# Altium PCB BLE.PcbDoc
Units mil, origin at the board's own origin, x right, y up, seen from the top; angles counter-clockwise.
Board outline 1660.03 x 1390.03 mil, 2 copper layers (Top Layer, Bottom Layer); 18 components, 16 nets, 103 pads, 3 vias.
Unrouted connection lines stored in the file: 4.
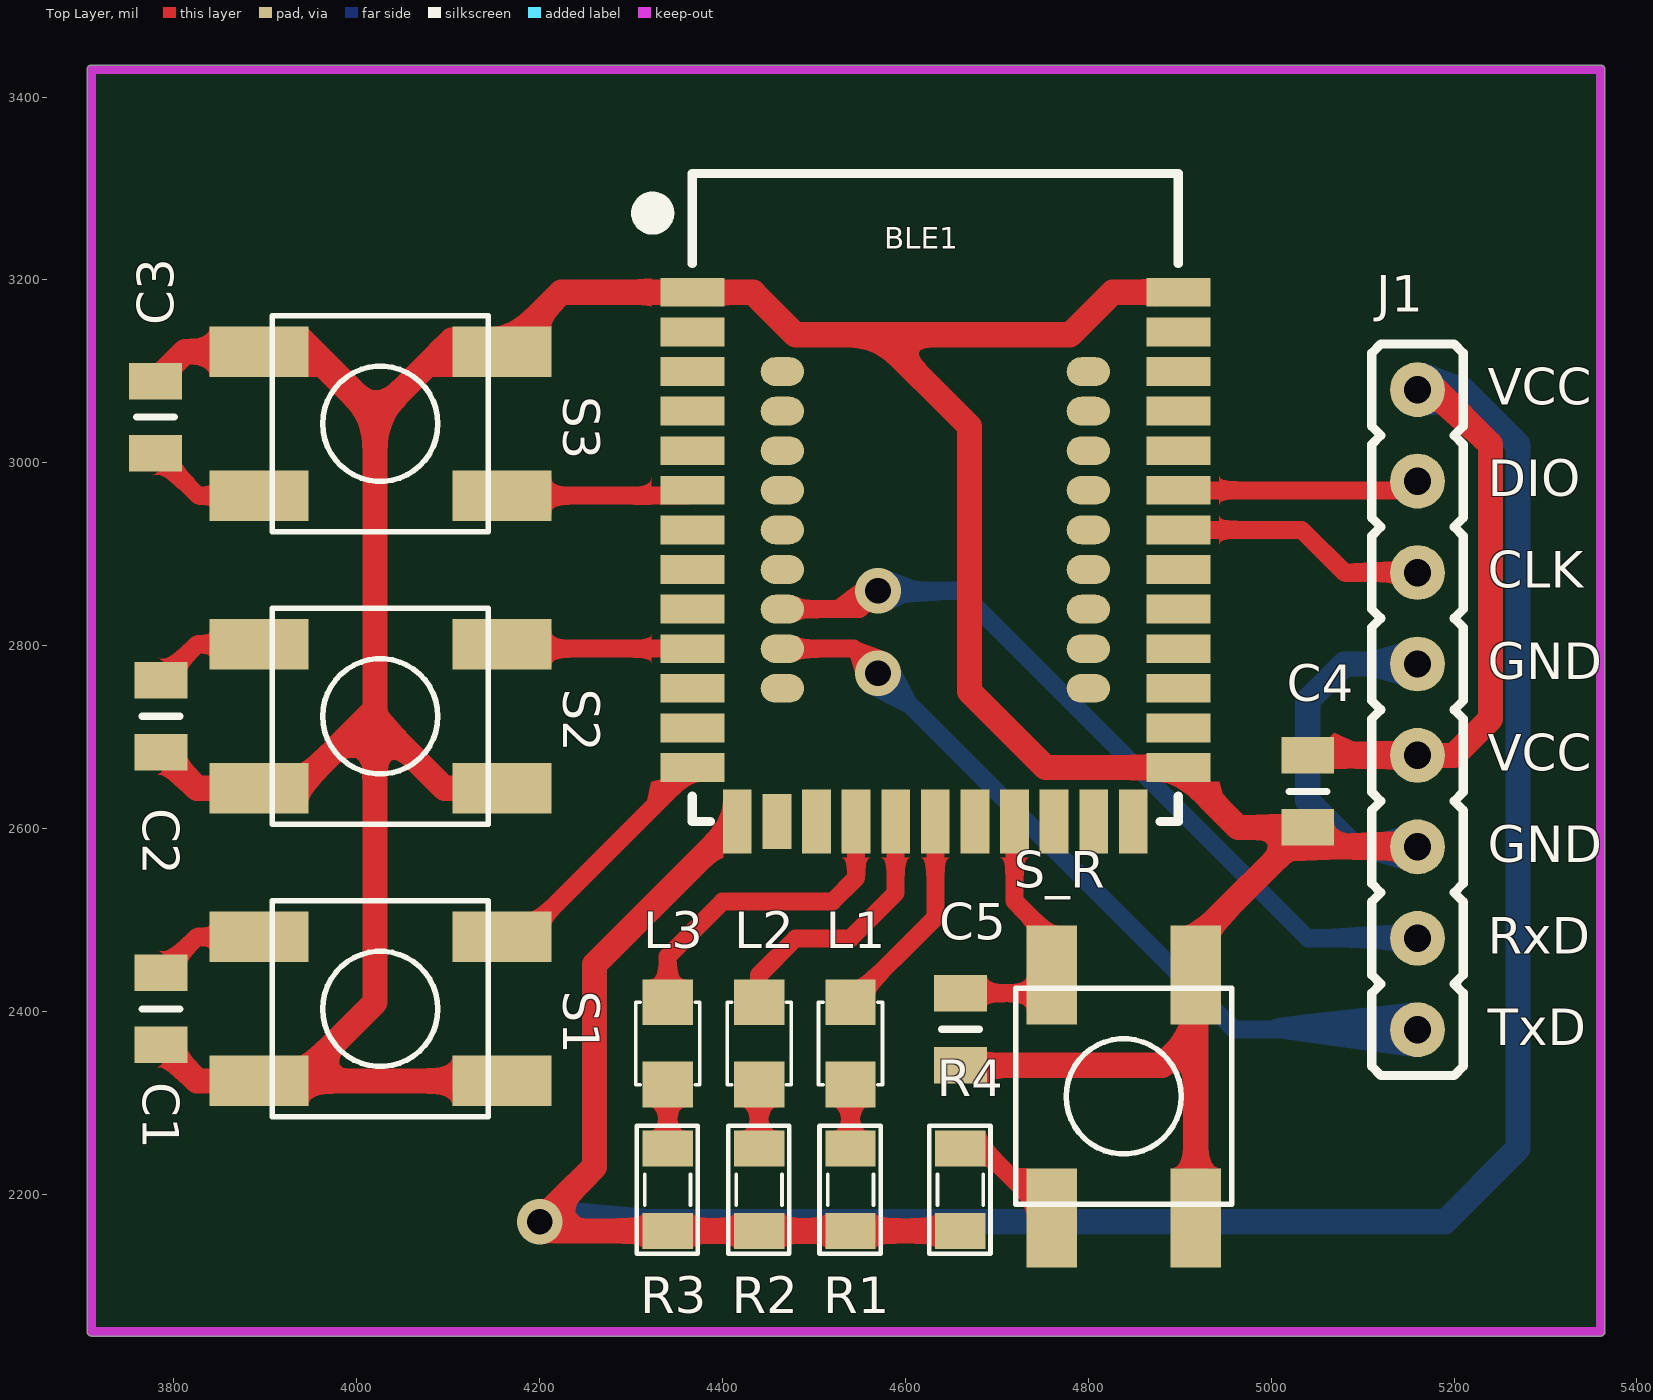
[diagram p0: Top Layer view]
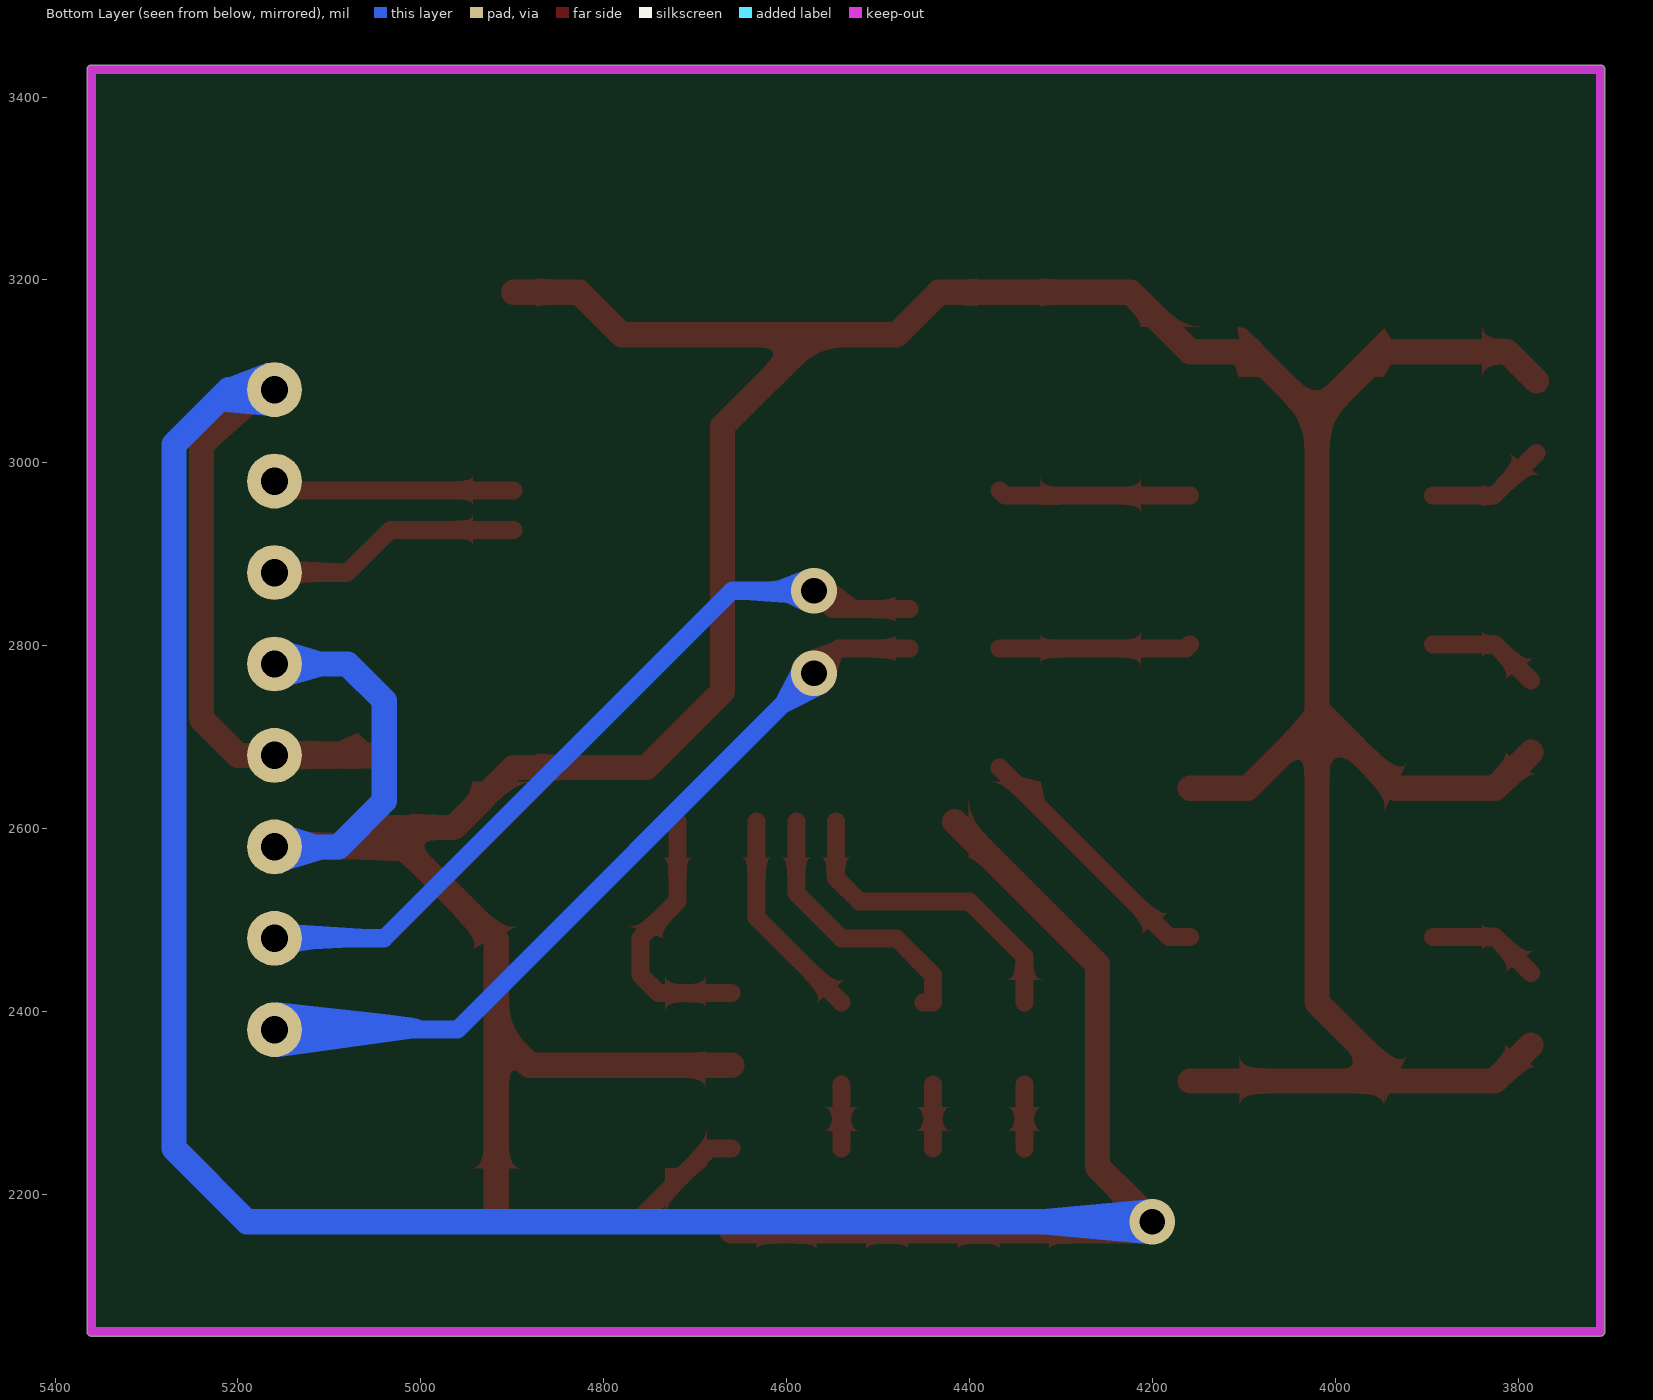
[diagram p1: Bottom Layer view, seen from below]

## Layer stack, top to bottom
Top Solder: solder mask 0.4, Solder Resist, Dk 3.5
Top Layer: signal copper 1.4
Dielectric 1: dielectric 12.6, FR-4, Dk 4.8
Bottom Layer: signal copper 1.4
Bottom Solder: solder mask 0.4, Solder Resist, Dk 3.5

## Board outline
3704.99,2050 3704.98,3430 cw(c3710,3430) 3710,3435.01 5360,3435.01 cw(c5360,3430) 5365.02,3430 5365.02,2050 cw(c5360,2050) 5360,2044.98 3710,2044.98 cw(c3710,2050)

## Design rules (kind name [scope] priority, off if disabled: settings)
Clearance [All] p1: gap=0 ignorepadtopadclearanceinfootprint=FALSE
PlaneConnect [All] p1: planeconnectstyle=Direct reliefexpansion=20 reliefentries=4 reliefconductorwidth=10 reliefairgap=10
PolygonConnect [All] p1: connectstyle=Direct reliefconductorwidth=10 reliefentries=4 polygonreliefangle="90 Angle" airgapwidth=10
RoomDefinition BLE [InComponentClass('BLE')] p1: confinementstyle=ConfineIn formatcopy=TRUE lockcomponents=FALSE outline 0,0 2000,0 2000,1000 0,1000
RoutingVias [All] p1: holewidth=28 width=50 viastyle="Through Hole" minholewidth=28 minwidth=50 maxholewidth=28 maxwidth=50
SolderMaskExpansion [All] p1: expansion=4
Width [All] p1: maxlimit=39.37 minlimit=19.68 preferedwidth=27.56 minimp=50.000000 maximp=50.000000 favimp=50.000000
29 further rules are at their usual default settings.

## Components (designator, comment, footprint, x,y, rotation, side; value= is the part's Value field where it differs from the comment)
BLE1 "Holyiot 18010" "Holyiot 18010" 4632.72,2897.09 r0 top
C1 "Cap" CAP-0805 3785.72,2402.77 r270 top
C2 "Cap" CAP-0805 3785.72,2722.77 r270 top
C3 "Cap" CAP-0805 3780,3050 r90 top
C4 "Cap" CAP-0805 5040,2640.63 r90 top
C5 "Cap" CAP-0805 4660,2380.63 r90 top
J1 "JP_8" JP_8 5160,3080 r270 top
L1 "LED" LED0805 4540,2365 r0 top
L2 "LED" LED0805 4440,2365 r0 top
L3 "LED" LED0805 4340,2365 r0 top
R1 "Res" RES-SMD-0805 4540,2205 r270 top
R2 "Res" RES-SMD-0805 4440,2205 r270 top
R3 "Res" RES-SMD-0805 4340,2205 r270 top
R4 "10k" RES0805 4660,2205 r270 top
S1 "Button" button_smd 4025.72,2402.77 r0 top
S2 "Button" button_smd 4025.72,2722.77 r0 top
S3 "Button" button_smd 4025.72,3042.77 r0 top
S_R "Button" button_smd 4838.74,2307.13 r90 top

## Footprints (in the part's own frame and the unit in brackets; to place one, negate y for a bottom-side part, rotate by r counter-clockwise, add the part's x,y. Pads: shape width x height; smd on the part's side, far side on the other; paste and mask are expansions set on the pad)
button_smd [mm]
  rect 2.75x1.4 smd: 1(-3.375,2) 1(3.375,2) 2(-3.375,-2) 2(3.375,-2)
  silkscreen extent -3,-3 3,3, body extent -4,-3 4,3.3, height 3.1
CAP-0805 [mil]
  rect 40x57.87 smd: 1(-39.37,0) 2(39.37,0)
  silkscreen extent 0,-21 0,21, body extent -39,-25 39,25, height 57
"Holyiot 18010" [mm]
  rect 1.778x0.8 smd: 1(-6.751,7.35) 2(-6.751,6.25) 3(-6.751,5.15) 4(-6.751,4.05) 5(-6.751,2.95) 6(-6.751,1.85) 7(-6.751,0.75) 8(-6.751,-0.35) 9(-6.751,-1.45) 10(-6.751,-2.55) 11(-6.751,-3.65) 12(-6.751,-4.75) 13(-6.751,-5.85) 32(6.749,7.35) 33(6.749,6.25) 34(6.749,5.15) 35(6.749,4.05) 36(6.749,2.95) 37(6.749,1.85) 38(6.749,0.75) 39(6.749,-0.35) 40(6.749,-1.45) 41(6.749,-2.55) 42(6.749,-3.65) 43(6.749,-4.75) 44(6.751,-5.852)
  oval 1.2x0.8 smd: 14(-4.251,5.15) 15(-4.251,4.05) 16(-4.251,2.95) 17(-4.251,1.85) 18(-4.251,0.75) 19(-4.251,-0.35) 20(-4.251,-1.45) 21(-4.251,-2.55) 22(-4.251,-3.65) 23(4.249,5.15) 24(4.249,4.05) 25(4.249,2.95) 26(4.249,1.85) 27(4.249,0.75) 28(4.249,-0.35) 29(4.249,-1.45) 30(4.249,-2.55) 31(4.249,-3.65)
  rect 0.8x1.778 smd: 45(5.499,-7.35) 46(4.399,-7.35) 47(3.299,-7.35) 48(2.199,-7.35) 49(1.099,-7.35) 50(-0.001,-7.35) 51(-1.101,-7.35) 52(-2.201,-7.35) 53(-3.301,-7.35) 55(-5.501,-7.35)
  rect 0.8x1.524 smd: 54(-4.401,-7.35)
  silkscreen extent -8.15,-7.35 6.75,10.65
JP_8 [mil]
  round 60 hole 30: 1(0,0) 2(100,0) 3(200,0) 4(300,0) 5(400,0) 6(500,0) 7(600,0) 8(700,0)
  silkscreen extent -50,-50 750,50, body extent -50,-50 750,50, height 336
LED0805 [mil]
  rect 55x50 smd: A(0,-45) C(0,45)
  silkscreen extent -35,-45 35,45, body extent -25,-40 25,40, height 43
RES0805 [mil]
  rect 39.37x55 smd: 1(-45,0) 2(45,0)
  silkscreen extent -70,-34 70,33, body extent -39,-25 39,25, height 31
RES-SMD-0805 [mil]
  rect 39.37x55 smd: 1(-45,0) 2(45,0)
  silkscreen extent -70,-34 70,33, body extent -39,-25 39,25, height 31

## Part data
BLE1: "Holyiot 18010 B?c Âu nRF52840 module Bluetooth mô-dun nang lu?ng th?p h?i d?ng phát tri?n cho BLE lu?i bluetooth 5"
R1 R2 R3: library part Res-SMD, "Resistor", Manufacturer="Generic Components", Class=Passive, Published=08/06/2000, Publisher="Altium Hobart Technology Centre"
R4: library part RES, "di?n tr? size nh?"

## Via types
v1: diameter 50, hole 28, Top Layer to Bottom Layer, 3 vias

## Nets (pads, with @x,y where several pads share a name; then routed paths per layer and width w, separated by ;. In a path a pad name is that pad's centre, name@x,y a point inside that pad or via, vN(x,y) a via of type N, cw(c..) or ccw(c..) an arc to the next point about the centre after c; other vN are vias at no path point)
B1: BLE1.13 C1.1 S1.1 | length 408.5
  Top Layer w19.68: C1.1 3825.1,2481.51 S1.1@3892.84,2481.51 ; S1.1@4158.59,2481.51 4181.67,2481.51 BLE1.13
B2: BLE1.10 C2.1 S2.1 | length 333.8
  Top Layer w19.68: C2.1 3825.1,2801.51 S2.1@3892.84,2801.51 ; S2.1@4158.59,2801.51 4163.42,2796.69 BLE1.10
B3: BLE1.6 C3.1 S3.2 | length 342.9
  Top Layer w19.68: C3.1 3826.6,2964.03 S3.2@3892.84,2964.03 ; S3.2@4158.59,2964.03 4361.04,2964.03 BLE1.6
CLK: BLE1.38 J1.3 | length 280.9
  Top Layer w19.68: BLE1.38 5033.38,2926.62 5080,2880 J1.3
DIO: BLE1.37 J1.2 | length 265.7
  Top Layer w19.68: BLE1.37 5149.92,2969.92 J1.2
GND: BLE1.1 BLE1.32 BLE1.44 C1.2 C2.2 C3.2 C4.1 C5.1 J1.4 J1.6 S1.2 S2.2 S3.1 S_R.2 | length 4992.7
  Top Layer w27.56: C3.2 3812.14,3121.51 3892.85,3121.51 3948.49,3121.51 4020,3050 ; C1.2 3825.09,2324.03 3892.84,2324.03 S1.2@3934.03,2324.03 ; C2.2 3825.09,2644.03 3892.84,2644.03 3934.03,2644.03 4020,2730 ; S1.2@4158.59,2324.03 S1.2@3934.03,2324.03 ; S2.2@4158.59,2644.03 4095.97,2644.03 4020,2720 ; C5.1 4881.26,2341.26 4917.48,2377.48 ; BLE1.32 4826.46,3186.46 4780,3140 4570,3140 ; S_R.2@4917.48,2174.25 4917.48,2377.48 ; J1.6 5061.26,2580 C4.1 ; S1.2@3934.03,2324.03 4020,2410 4020,2720 ; 4020,2720 4020,2730 ; 4020,2730 4020,3050 ; 4020,3050 4091.51,3121.51 4158.59,3121.51 4223.54,3186.46 BLE1.1 4433.54,3186.46 4480,3140 4570,3140 ; 4570,3140 4670,3040 4670,2750 4753.29,2666.71 BLE1.44 4963.96,2601.26 C4.1 ; 4917.48,2377.48 4917.48,2440 4917.48,2478.74 C4.1
  Bottom Layer w27.56: J1.6 5090,2580 5040,2630 5040,2740 5080,2780 J1.4
L1: BLE1.50 L1.C | length 236.1
  Top Layer w19.68: L1.C 4632.68,2502.68 BLE1.50
L2: BLE1.51 L2.C | length 304.7
  Top Layer w19.68: L2.C@4450,2410 L2.C 4440,2440 4480,2480 4540,2480 4589.37,2529.37 BLE1.51
L3: BLE1.52 L3.C | length 353.4
  Top Layer w19.68: L3.C 4340,2460 4400,2520 4520,2520 4546.06,2546.06 BLE1.52
NetL1_A: L1.A R1.1 | length 70
  Top Layer w19.68: R1.1 L1.A
NetL2_A: L2.A R2.1 | length 70
  Top Layer w19.68: R2.1 L2.A
NetL3_A: L3.A R3.1 | length 70
  Top Layer w19.68: R3.1 L3.A
Reset: BLE1.48 C5.2 R4.1 S_R.1 | length 424.2
  Top Layer w19.68: R4.1 4684.25,2250 S_R.1@4760,2174.25 ; C5.2 4740,2420 4760,2440 4760,2480 4719.29,2520.71 BLE1.48
RxD: BLE1.20 J1.7 | length 860.3
  Top Layer w19.68: BLE1.20 4550,2840 v1(4570,2860)
  Bottom Layer w19.68: v1(4570,2860) 4660,2860 5040,2480 J1.7
TxD: BLE1.21 J1.8 | length 867.2
  Top Layer w19.68: BLE1.21 4543.31,2796.69 v1(4570,2770)
  Bottom Layer w19.68: v1(4570,2770) 4960,2380 J1.8
Vcc: BLE1.55 C4.2 J1.1 J1.5 R1.2 R2.2 R3.2 R4.2 | length 3620.8
  Top Layer w27.56: BLE1.55 4260,2451.58 4260,2230 v1(4200,2170) 4210,2160 R3.2 R2.2 R1.2 R4.2 ; C4.2 J1.5 5200,2680 5240,2720 5240,3020 5180,3080 J1.1
  Bottom Layer w27.56: v1(4200,2170) 5190,2170 5270,2250 5270,3020 5210,3080 J1.1
pads on no net: BLE1.2 BLE1.3 BLE1.4 BLE1.5 BLE1.7 BLE1.8 BLE1.9 BLE1.11 BLE1.12 BLE1.14 BLE1.15 BLE1.16 BLE1.17 BLE1.18 BLE1.19 BLE1.22 BLE1.23 BLE1.24 BLE1.25 BLE1.26 BLE1.27 BLE1.28 BLE1.29 BLE1.30 BLE1.31 BLE1.33 BLE1.34 BLE1.35 BLE1.36 BLE1.39 BLE1.40 BLE1.41 BLE1.42 BLE1.43 BLE1.45 BLE1.46 BLE1.47 BLE1.49 BLE1.53 BLE1.54

## Polygon pours and split planes (outlines as drawn)
no net on Top Layer "Top Layer-No Net" (solid, pour order 4): 4260,2930

## Keep-outs
Keep-Out Layer:
  lines w10: 3710,2050 3710,3430 5360,3430 5360,2050 3710,2050

## Other copper
Top Layer:
  region net B1: 4321.81,2651.3 4315.34,2620.28 4346.21,2657.32
  region net Vcc: 5068.82,2704.88 5103.11,2689.72 5043.2,2680.34
  region net GND: 5063.73,2566.12 4997.61,2563.07 5017.42,2606.64
  region net GND: 4943.39,2651.08 4947.88,2633.54 4916.79,2649.01
  region net TxD: 4545.41,2768.11 4539.51,2788.63 4550.1,2803.73 4579.31,2792.96
  region net RxD: 4545.73,2866.69 4523.11,2849.6 4560.04,2847.55
  region net GND: 3946.43,3146.95 4007.13,3086.24 ccw(c4029.03,3108.13) 4029.03,3077.17 ccw(c4029.03,3054.87) 4013.26,3070.64 4000.81,3058.18 3952.84,3106.15 ccw(c3927.44,3080.75) 3927.44,3116.67
  region: 3932.58,3147.98
  region: 3945.92,3149.01
  region net GND: 4106.52,3148.49 ccw(c4106.52,3129.91) 4093.38,3143.05 4079.31,3128.99 4093.47,3114.83 ccw(c4101.38,3122.74) 4101.38,3111.55
  region net GND: 4105.68,3094.28 4065.54,3094.11 4073.15,3101.72 cw(c4113.35,3061.52) 4113.35,3118.36
  region net GND: 3946.74,3094.11 3963.75,3094.11 cw(c3963.75,3074.01) 3977.96,3088.22 3953.89,3112.29 ccw(c3931.04,3089.45) 3931.04,3121.75
  region net GND: 4985.37,2587.4 4986.61,2587.4 cw(c4986.61,2575.55) 4994.99,2583.93 cw(c4992.59,2581.54) 4995.98,2581.54 4995.98,2580.16 cw(c4987.6,2580.16) 4993.53,2574.24 5001.47,2582.18 cw(c5015.02,2568.64) 5015.02,2587.79
  region net Vcc: 4247.24,2196.92 4243.64,2193.32 ccw(c4254.81,2182.16) 4239.02,2182.16 ccw(c4245.66,2182.16) 4240.96,2177.46 4241.58,2176.84 ccw(c4248.93,2184.19) 4248.93,2173.8 4229.51,2173.8 ccw(c4229.51,2150.2) 4212.82,2166.89
  region net GND: 3991.2,2361.99 3985.72,2356.51 ccw(c3998.13,2344.11) 3980.59,2344.11 ccw(c3985.32,2344.11) 3981.97,2340.76 3982.32,2340.42 ccw(c3989.26,2347.36) 3989.26,2337.54 3988.82,2337.54 ccw(c3988.82,2292.63) 3957.06,2324.39 ccw(c3946.74,2314.07) 3946.74,2328.66 3944.96,2328.66
  region net GND: 3978.97,2669.86 3980.04,2670.93 cw(c3995.99,2654.99) 3995.99,2677.54 cw(c3995.99,2670.29) 4001.12,2675.41 4001.33,2675.2 cw(c3989.65,2663.52) 4006.17,2663.52 4006.17,2654.52 ccw(c3978.78,2681.9) 4017.51,2681.9 4017.51,2718.41
  region: 4211.73,2509.37
Bottom Layer:
  region net TxD: 5000.28,2390.64 5021.77,2391.79 5025.27,2382.69
  region net TxD: 5000.28,2390.64 4980.95,2387.03 5038.43,2383.18
  region net GND: 5143.74,2756.02 5096.08,2769.71 5104.27,2792.12 5152.64,2806.35
  region net GND: 5113.33,2593.32 5149.96,2604.88 5144.64,2554.74 5098.94,2568.79
  region net Vcc: 5168.28,3109.54 5215.54,3091.44 5215.53,3055.78 5161.22,3050.7 5156.12,3066.26
  region: 5170.54,3109.26
  region net RxD: 4583.33,2838.73 4615.89,2855.01 4610.06,2871.29 4577.8,2883.59
  region net TxD: 4587.86,2787.61 4610.55,2743.57 4598.1,2727.56 4556.06,2748.91
  region: 4592.3,2781.62
  region: 4000,2640
  region: 3990,2680

## Silkscreen, mask and mechanical layers (free items; w line width, h text height)
Top Overlay:
  text "VCC" at 5236.71,3063.29 h40
  text "DIO" at 5236.71,2963.29 h40
  text "CLK" at 5236.71,2863.29 h40
  text "GND" at 5236.71,2763.29 h40
  text "VCC" at 5236.71,2663.29 h40
  text "GND" at 5236.71,2563.29 h40
  text "RxD" at 5236.71,2463.29 h40
  text "TxD" at 5236.71,2363.29 h40